# Altium PCB PCB_CSN_V3_1.PcbDoc
Units mil, origin at the board's own origin, x right, y up, seen from the top; angles counter-clockwise.
Board outline 3040 x 2075 mil, 2 copper layers (Top Layer, Bottom Layer); 91 components, 63 nets, 350 pads, 57 vias.
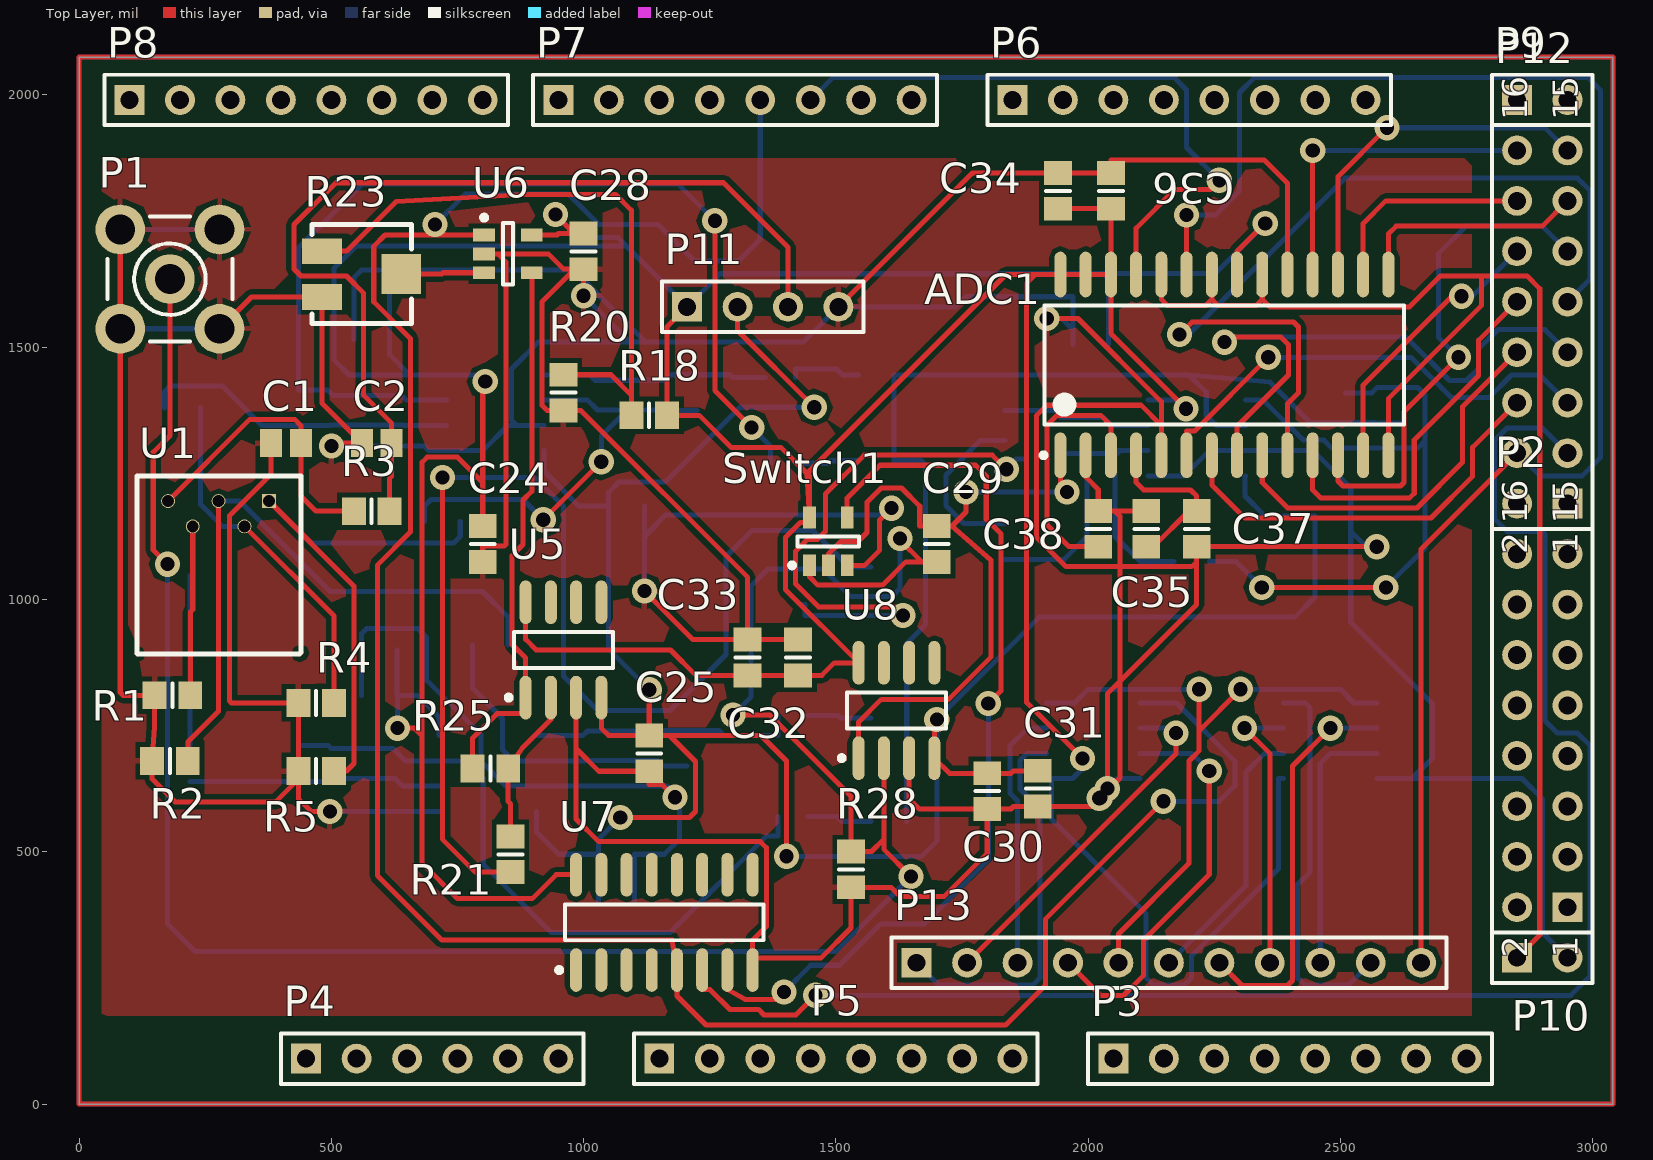
[diagram p0: Top Layer view]
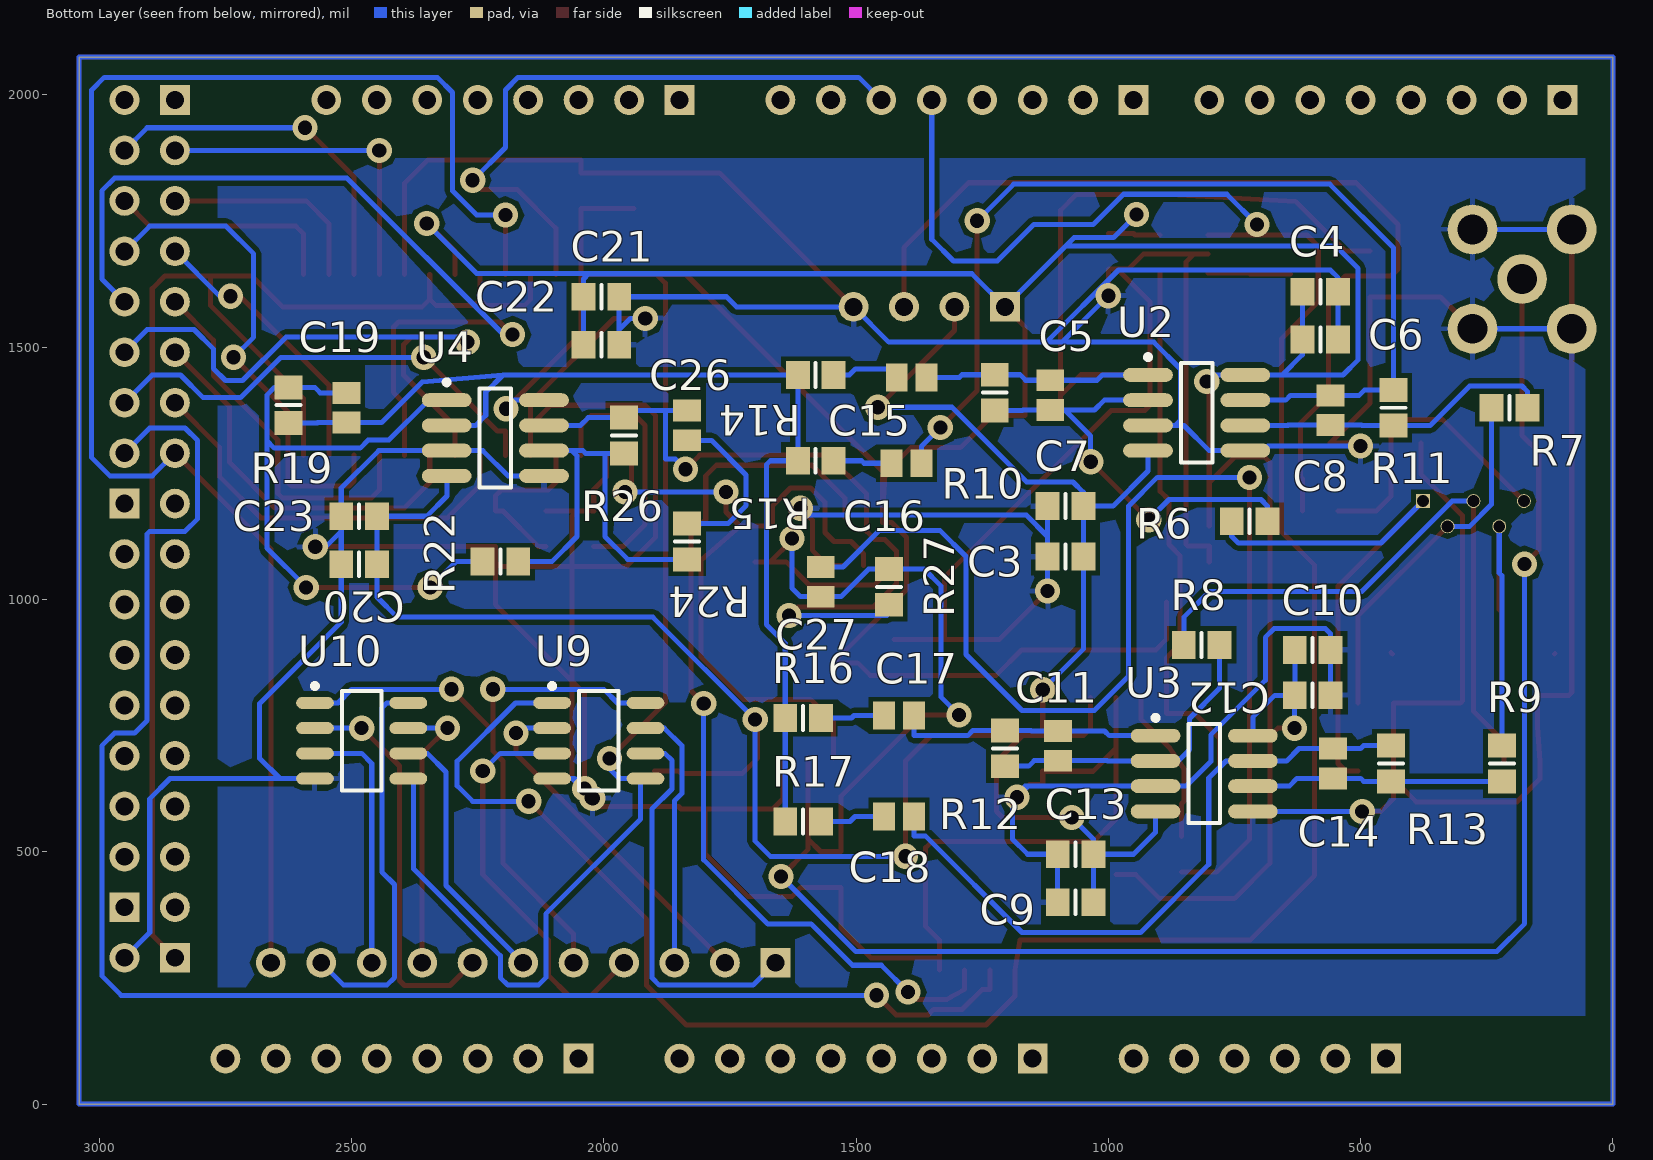
[diagram p1: Bottom Layer view, seen from below]

## Layer stack, top to bottom
Top Layer: signal copper 1.4
Dielectric: dielectric 12.6, FR-4, Dk 4.8
Bottom Layer: signal copper 1.4

## Board outline
0,0 0,2075 3040,2075 3040,0 0,0

## Design rules (kind name [scope] priority, off if disabled: settings)
Clearance [All] p1: gap=10
PolygonConnect [All] p1: connectstyle=Relief reliefconductorwidth=10 reliefentries=4 polygonreliefangle="90 Angle"
RoutingVias [All] p1: holewidth=28 width=50 viastyle="Through Hole" minholewidth=28 minwidth=50 maxholewidth=28 maxwidth=50
SilkscreenOverComponentPads [All] p1: minsilkscreentomaskgap=10
SolderMaskExpansion [All] p1: expansion=4
Width [All] p1: maxlimit=10 minlimit=10 preferedwidth=10
27 further rules are at their usual default settings.

## Classes and differential pairs
component class "Components Class 1": C3 C4 C5 C6 C7 C8 C9 C10 C11 C12 C13 C14 C15 C16 C17 C18 C19 C20 C21 C22 C23 C26 C27 R6 R7 R8 R9 R10 R11 R12 R13 R14 R15 R16 R17 R19 R22 R24 R26 R27 U2 U3 U4 U9 U10
net class potencia: +5 +70V -5 GND
net class digital: DGND NetADC1_6 NetADC1_7 NetADC1_8 NetADC1_9 NetADC1_10 NetADC1_11 NetADC1_12 NetADC1_13 NetADC1_15 NetADC1_16 NetADC1_17 NetADC1_18 NetADC1_23 NetADC1_25 NetP12_1 NetP12_2 NetP12_3
net class analog: NetADC1_1 NetADC1_4 NetC27_2 NetR18_2 NetR23_W NetR25_2
component class Logica_ADC: ADC1 C29 C30 C31 C32 C33 C34 C35 C36 C37 C38 P2 P3 P4 P5 P6 P7 P8 P9 P10 P11 P12 P13 R28 Switch1 U7 U8 U9 U10
component class Hamamatsu_acond: C1 C2 C3 C4 C5 C6 C7 C8 C9 C10 C11 C12 C13 C14 C15 C16 C17 C18 C19 C20 C21 C22 C23 C24 C25 C26 C27 C28 P1 R1 R2 R3 R4 R5 R6 R7 R8 R9 R10 R11 R12 R13 R14 R15 R16 R17 R18 R19 R20 R21 R22 R23 R24 R25 R26 R27 U1 U2 U3 U4 U5 U6

## Components (designator, comment, footprint, x,y, rotation, side; value= is the part's Value field where it differs from the comment)
ADC1 "LTC1415" SO28_N 2270,1465 r90 top
C1 "Cap" C0805 410,1310 r0 top
C2 "Cap" C0805 590,1310 r0 top
C3 "Cap Pol3" 6-0805_N 1085,1085 r180 bottom
C4 "Cap Pol3" 6-0805_N 580,1610 r180 bottom
C5 "Cap" C0805 1115,1405 r90 bottom
C6 "Cap" 6-0805_N 580,1515 r0 bottom
C7 "Cap" 6-0805_N 1085,1185 r180 bottom
C8 "Cap" C0805 560,1375 r90 bottom
C9 "Cap Pol3" 6-0805_N 1065,400 r180 bottom
C10 "Cap Pol3" 6-0805_N 595,900 r180 bottom
C11 "Cap" C0805 1100,710 r90 bottom
C12 "Cap" 6-0805_N 595,810 r0 bottom
C13 "Cap" 6-0805_N 1065,495 r180 bottom
C14 "Cap" C0805 555,675 r90 bottom
C15 "Cap" C0805 1390,1440 r0 bottom
C16 "Cap" C0805 1400,1270 r0 bottom
C17 "Cap" C0805 1415,770 r0 bottom
C18 "Cap" C0805 1415,570 r0 bottom
C19 "Cap" C0805 2510,1380 r90 bottom
C20 "Cap Pol3" 6-0805_N 2485,1070 r180 bottom
C21 "Cap Pol3" 6-0805_N 2005,1600 r180 bottom
C22 "Cap" 6-0805_N 2005,1505 r0 bottom
C23 "Cap" 6-0805_N 2485,1165 r180 bottom
C24 "Cap" 6-0805_N 800,1110 r90 top
C25 "Cap" 6-0805_N 1130,695 r270 top
C26 "Cap" C0805 1835,1345 r90 bottom
C27 "Cap" C0805 1570,1035 r270 bottom
C28 "Cap" 6-0805_N 1000,1690 r270 top
C29 "Cap" 6-0805_N 1700,1110 r90 top
C30 "Cap" 6-0805_N 1800,620 r270 top
C31 "Cap Pol3" 6-0805_N 1900,625 r90 top
C32 "Cap" 6-0805_N 1425,885 r270 top
C33 "Cap Pol3" 6-0805_N 1325,885 r90 top
C34 "Cap Pol3" 6-0805_N 1940,1810 r90 top
C35 "Cap Pol3" 6-0805_N 2115,1140 r90 top
C36 "Cap" 6-0805_N 2045,1810 r270 top
C37 "Cap" 6-0805_N 2215,1140 r90 top
C38 "Cap" 6-0805_N 2020,1140 r90 top
P1 "SMB" SMB_V-RJ45 180,1635 r0 top
P2 "Header 8X2" HDR2X8 2950,390 r90 top
P3 "Header 8" HDR1X8 2050,90 r0 top
P4 "Header 6" HDR1X6 450,90 r0 top
P5 "Header 8" HDR1X8 1150,90 r0 top
P6 "Header 8" HDR1X8 1850,1990 r0 top
P7 "Header 8" HDR1X8 950,1990 r0 top
P8 "Header 8" HDR1X8 100,1990 r0 top
P9 "Header 2" HDR1X2 2850,1990 r0 top
P10 "Header 2" HDR1X2 2850,290 r0 top
P11 "Header 4" HDR1X4 1205,1580 r0 top
P12 "Header 8X2" HDR2X8 2950,1190 r90 top
P13 "Header 11" HDR1X11 1660,280 r0 top
R1 "Res3" 6-0805_N 185,810 r0 top
R2 "Res3" 6-0805_N 180,680 r0 top
R3 "Res3" 6-0805_N 580,1175 r0 top
R4 "Res3" 6-0805_N 470,795 r0 top
R5 "Res3" 6-0805_N 470,660 r0 top
R6 "Res3" 6-0805_N 720,1155 r180 bottom
R7 "Res3" 6-0805_N 205,1380 r180 bottom
R8 "Res3" 6-0805_N 815,910 r180 bottom
R9 "Res3" 6-0805_N 220,675 r270 bottom
R10 "Res3" 6-0805_N 1225,1410 r90 bottom
R11 "Res3" 6-0805_N 435,1380 r90 bottom
R12 "Res3" 6-0805_N 1205,705 r90 bottom
R13 "Res3" 6-0805_N 440,675 r90 bottom
R14 "Res3" 6-0805_N 1580,1445 r0 bottom
R15 "Res3" 6-0805_N 1580,1275 r0 bottom
R16 "Res3" 6-0805_N 1605,765 r0 bottom
R17 "Res3" 6-0805_N 1605,560 r0 bottom
R18 "Res3" 6-0805_N 1130,1365 r180 top
R19 "Res3" 6-0805_N 2625,1385 r90 bottom
R20 "Res3" 6-0805_N 960,1410 r90 top
R21 "Res3" 6-0805_N 855,495 r90 top
R22 "Res3" 6-0805_N 2205,1075 r180 bottom
R23 "RPot SM" POT4MM-2 560,1645 r0 top
R24 "Res3" 6-0805_N 1835,1115 r90 bottom
R25 "Res3" 6-0805_N 815,665 r180 top
R26 "Res3" 6-0805_N 1960,1325 r90 bottom
R27 "Res3" 6-0805_N 1435,1025 r90 bottom
R28 "Res3" 6-0805_N 1530,465 r90 top
Switch1 "SN74LVC1G66DBVR" SOT23-5_N 1485,1115 r90 top
U1 "MPPC_S10985" S10985_HAM 115,1245 r0 top
U2 "AD8002AR" SO-8_M 825,1370 r180 bottom
U3 "AD8002AR" SO-8_M 810,655 r180 bottom
U4 "AD8002" SO-8_M 2215,1320 r180 bottom
U5 "THS4062" S8_N 960,900 r90 top
U6 "ADCMP600" SOT23-5_N 850,1685 r0 top
U7 "SN74LS279AD" D016_N 1160,360 r90 top
U8 "AD8066" S8_N 1620,780 r90 top
U9 "DS1100-500" SO-8_L 2010,720 r180 bottom
U10 "DS1100-500" SO-8_L 2480,720 r180 bottom

## Footprints (in the part's own frame and the unit in brackets; to place one, negate y for a bottom-side part, rotate by r counter-clockwise, add the part's x,y. Pads: shape width x height; smd on the part's side, far side on the other; paste and mask are expansions set on the pad)
6-0805_N [mm] "Chip Resistor, Body 2.0x1.2mm, IPC Medium Density"
  rect 1.2x1.4 smd: 1(-0.9,0) 2(0.9,0)
  silkscreen extent 0,-0.6 0,0.6, body extent -1.07,-0.7 1.07,0.7, height 0.7
C0805 [mm] "Chip Capacitor, Body 2.0x1.3mm, IPC High Density"
  rect 1.1x1.4 smd: 1(-0.75,0) 2(0.75,0)
  body extent -1.1,-0.72 1.1,0.72, height 1.4
D016_N [mm] "SOIC, 16-Leads, Body 9.9x3.9mm, Pitch 1.27mm, IPC Medium Density"
  oval 2.2x0.6 smd: 1(-2.4,4.445) 2(-2.4,3.175) 3(-2.4,1.905) 4(-2.4,0.635) 5(-2.4,-0.635) 6(-2.4,-1.905) 7(-2.4,-3.175) 8(-2.4,-4.445) 9(2.4,-4.445) 10(2.4,-3.175) 11(2.4,-1.905) 12(2.4,-0.635) 13(2.4,0.635) 14(2.4,1.905) 15(2.4,3.175) 16(2.4,4.445)
  silkscreen extent -2.52,-5 0.9,5.42, body extent -1.95,-4.95 1.95,4.95, height 1.75
HDR1X2 [mm] "Connector; Header; 2 Position"
  rect 1.5x1.5 hole 0.9: 1(0,0)
  round 1.5 hole 0.9: 2(2.54,0)
  silkscreen extent -1.27,-1.27 3.81,1.27
HDR1X4 [mm] "Connector; Header; 4 Position"
  rect 1.5x1.5 hole 0.9: 1(0,0)
  round 1.5 hole 0.9: 2(2.54,0) 3(5.08,0) 4(7.62,0)
  silkscreen extent -1.27,-1.27 8.89,1.27
HDR1X6 [mm] "Connector; Header; 6 Position"
  rect 1.5x1.5 hole 0.9: 1(0,0)
  round 1.5 hole 0.9: 2(2.54,0) 3(5.08,0) 4(7.62,0) 5(10.16,0) 6(12.7,0)
  silkscreen extent -1.27,-1.27 13.97,1.27
HDR1X8 [mm] "Connector; Header; 8 Position"
  rect 1.5x1.5 hole 0.9: 1(0,0)
  round 1.5 hole 0.9: 2(2.54,0) 3(5.08,0) 4(7.62,0) 5(10.16,0) 6(12.7,0) 7(15.24,0) 8(17.78,0)
  silkscreen extent -1.27,-1.27 19.05,1.27
HDR1X11 [mm] "Connector; Header; 11 Position"
  rect 1.5x1.5 hole 0.9: 1(0,0)
  round 1.5 hole 0.9: 2(2.54,0) 3(5.08,0) 4(7.62,0) 5(10.16,0) 6(12.7,0) 7(15.24,0) 8(17.78,0) 9(20.32,0) 10(22.86,0) 11(25.4,0)
  silkscreen extent -1.27,-1.27 26.67,1.27
HDR2X8 [mm] "Connector; Header; 8x2 Position"
  rect 1.5x1.5 hole 0.9: 1(0,0)
  round 1.5 hole 0.9: 2(0,2.54) 3(2.54,0) 4(2.54,2.54) 5(5.08,0) 6(5.08,2.54) 7(7.62,0) 8(7.62,2.54) 9(10.16,0) 10(10.16,2.54) 11(12.7,0) 12(12.7,2.54) 13(15.24,0) 14(15.24,2.54) 15(17.78,0) 16(17.78,2.54)
  silkscreen extent -1.27,-1.27 19.05,3.81
POT4MM-2 [mm] "Square Trimming Potentiometer"
  rect 2x1.3 smd: CCW(-2,-1.15) CW(-2,1.15)
  rect 2x2 smd: W(2,0)
  silkscreen extent -2.5,-2.5 2.5,2.5
S8_N [mm] "SOIC, 8-Leads, Body 4.9x3.9mm, Pitch 1.27mm, IPC Medium Density"
  oval 2.2x0.6 smd: 1(-2.4,1.905) 2(-2.4,0.635) 3(-2.4,-0.635) 4(-2.4,-1.905) 5(2.4,-1.905) 6(2.4,-0.635) 7(2.4,0.635) 8(2.4,1.905)
  silkscreen extent -2.52,-2.5 0.9,2.88, body extent -2,-2.5 2,2.5, height 1.76
S10985_HAM [mm]
  rect 0.7x0.7 hole 0.6: 1(6.64,-1.27)
  round 0.7 hole 0.6: 2(5.4,-2.54) 3(4.1,-1.27) 4(2.8,-2.54) 5(1.56,-1.27)
  Top Layer lines w0.254: 0,-8.95 0.025,-8.975 ; 8.175,-8.975 8.25,-8.9
  silkscreen extent 0,-8.97 8.25,0
SMB_V-RJ45 [mm] "Connector; SMB Straight"
  round 2.5 hole 1.5: 1(0,0) 2(-2.5,-2.5) 2(-2.5,2.5) 2(2.5,-2.5) 2(2.5,2.5)
  silkscreen extent -3.15,-3.15 3.15,3.15
SO28_N [mm] "28-Pin Plastic Small Outline Integrated Circuit 1.27 mm Pitch, IPC Medium Density"
  oval 2.3x0.6 smd: 1(-4.55,8.255) 2(-4.55,6.985) 3(-4.55,5.715) 4(-4.55,4.445) 5(-4.55,3.175) 6(-4.55,1.905) 7(-4.55,0.635) 8(-4.55,-0.635) 9(-4.55,-1.905) 10(-4.55,-3.175) 11(-4.55,-4.445) 12(-4.55,-5.715) 13(-4.55,-6.985) 14(-4.55,-8.255) 15(4.55,-8.255) 16(4.55,-6.985) 17(4.55,-5.715) 18(4.55,-4.445) 19(4.55,-3.175) 20(4.55,-1.905) 21(4.55,-0.635) 22(4.55,0.635) 23(4.55,1.905) 24(4.55,3.175) 25(4.55,4.445) 26(4.55,5.715) 27(4.55,6.985) 28(4.55,8.255)
  silkscreen extent -4.67,-9.05 3,9.23, body extent -3.8,-9.06 3.8,9.06, height 2.65
SO-8_L [mm] "SOIC, 8-Leads, Body 4.9x3.9mm, Pitch 1.27mm, IPC High Density"
  oval 1.9x0.6 smd: 1(-2.35,1.905) 2(-2.35,0.635) 3(-2.35,-0.635) 4(-2.35,-1.905) 5(2.35,-1.905) 6(2.35,-0.635) 7(2.35,0.635) 8(2.35,1.905)
  silkscreen extent -2.48,-2.5 1,2.88, body extent -1.95,-2.45 1.95,2.45, height 1.75
SO-8_M [mm] "SOIC, 8-Leads, Body 4.9x3.9mm, Pitch 1.27mm, IPC Low Density"
  oval 2.5x0.7 smd: 1(-2.45,1.905) 2(-2.45,0.635) 3(-2.45,-0.635) 4(-2.45,-1.905) 5(2.45,-1.905) 6(2.45,-0.635) 7(2.45,0.635) 8(2.45,1.905)
  silkscreen extent -2.58,-2.5 0.8,2.93, body extent -2,-2.5 2,2.5, height 1.75
SOT23-5_N [mm] "SOT23, 5-Leads, Body 2.9x1.6mm, Pitch 0.95mm, Lead Span 2.8mm, IPC Medium Density"
  rect 1.1x0.65 smd: 1(-1.2,0.95) 2(-1.2,0) 3(-1.2,-0.95) 4(1.2,-0.95) 5(1.2,0.95)
  silkscreen extent -1.32,-1.55 0.25,1.95, body extent -0.9,-1.55 0.9,1.55, height 1.45

## Part data
C1 C2 C5 C6 C7 C8 C11 C12 C13 C14 C15 C16 C17 C18 C19 C22 C23 C24 C25 C26 C27 C28 C29 C30 C32 C36 C37 C38: "Capacitor"
C3 C4 C9 C10 C20 C21 C31 C33 C34 C35: "Polarized Capacitor (Surface Mount)"
P1: "SMB Straight Connector"
P2 P12: "Header, 8-Pin, Dual row"
P3 P5 P6 P7 P8: "Header, 8-Pin"
P4: "Header, 6-Pin"
P9 P10: "Header, 2-Pin"
P11: "Header, 4-Pin"
P13: "Header, 11-Pin"
R1 R2 R3 R4 R5 R6 R7 R8 R9 R10 R11 R12 R13 R14 R15 R16 R17 R18 R19 R20 R21 R22 R24 R25 R26 R27 R28: "Resistor"
R23: "Square Trimming Potentiometer"
U2 U3: "Dual 600MHz, 50mW Current Feedback Amplifier"
U4: library part AD8002AR, "Dual 600MHz, 50mW Current Feedback Amplifier"
U5 U8: library part LT1253CS8, "Low Cost Dual Video Amplifier"
U7: "Quadruple S-R Latches"

## Via types
v1: diameter 50, hole 28, Top Layer to Bottom Layer, 57 vias

## Nets (pads, with @x,y where several pads share a name; then routed paths per layer and width w, separated by ;. In a path a pad name is that pad's centre, name@x,y a point inside that pad or via, vN(x,y) a via of type N, cw(c..) or ccw(c..) an arc to the next point about the centre after c; other vN are vias at no path point)
+5: ADC1.21 ADC1.26 ADC1.27 ADC1.28 C4.1 C6.2 C10.1 C12.2 C21.1 C22.2 C24.2 C28.1 C32.2 C33.1 C34.1 C36.2 P11.1 R18.1 Switch1.5 U2.8 U3.8 U4.8 U5.8 U6.5 U7.16 U8.8 U9.5 U10.5 | length 11401
  Top Layer w10: v1(631,745) 664,745 680,729 ; C24.2 800,1232 ; v1(805,1432) 800,1427 800,1232 ; U5.8 885,921 906,900 1172,900 1222.43,849.57 C33.1 1374,849.57 C32.2 1472,849.57 1496.92,874.49 U8.8 1399.8,1019.69 1399.8,1122.8 1430,1153 1447.6,1153 Switch1.5 ; U6.5 947,1722.4 950.03,1725.43 972,1725.43 ; v1(944,1763) 972,1735 972,1725.43 ; U7.16 945.49,454.49 898,407 750,407 680,477 680,729 ; C28.1 972,1725.43 ; P11.1 1165.43,1540.43 R18.1 1229,1365 1293,1301 1391.6,1301 1442.87,1249.73 ; C34.1 1992,1774.57 C36.2 ADC1.26 ; v1(1989,685) 1878,796 1878,1627 1895,1644 ; v1(2194,1378) 2045,1527 ADC1.26 ; ADC1.21 2295,1690 2350,1745 v1(2351,1745) ; 680,729 680,1272 690,1282 750,1282 800,1232 ; 1442.87,1249.73 1837.14,1644 1895,1644 ; 1442.87,1249.73 Switch1.5 ; 1442.87,1249.73 1447.6,1245 Switch1.5 ; 1895,1644 1945,1644 ADC1.28 ADC1.27 ADC1.26
  Bottom Layer w10: C4.1 C6.2 615.43,1485 655.43,1445 ; C10.1 C12.2 C12.2@631,810 ; v1(631,745) C12.2@631,810 ; U3.8 713.54,766.46 670,810 C12.2@631,810 ; v1(805,1432) 792,1445 U2.8 655.43,1445 ; v1(944,1763) 990,1717 1068,1717 1084,1701 ; U9.5 U9.5@1927,645 ; v1(1989,685) 1989,665 1969,645 U9.5@1927,645 ; C22.2 C21.1 2040.43,1635.13 2030,1645.57 1270.57,1645.57 ; U4.8 2177,1395 v1(2194,1378) ; v1(2351,1745) 2252,1646 1271,1646 1270.57,1645.57 ; U10.5 2377,645 2377,466 2205,294 2205,250.47 2190,235.47 2130,235.47 2115,250.47 2115,377 1927,565 U9.5@1927,645 ; 655.43,1445 535,1445 505,1475 505,1656 550,1701 1084,1701 ; 1084,1701 P11.1 1270.57,1645.57
+70V: C2.2 P11.3 R3.2 | length 1887
  Top Layer w10: R3.2 615.43,1240 619.53,1244.09 C2.2 619.53,1349.47 564,1405 564,1607 530,1641 440,1641 426,1655 426,1743 509,1826 1277,1826 1405,1698 P11.3
-5: C3.2 C7.2 C9.2 C13.2 C20.2 C23.2 C25.1 C30.1 C31.2 P11.2 U2.4 U3.4 U4.4 U5.4 U8.4 | length 4845.3
  Top Layer w10: U5.4 1035,745 1049.57,730.43 C25.1 ; v1(1072.51,567.94) 1210,567.94 1221.62,579.57 1221.62,678.81 1170,730.43 ; v1(1130,821) C25.1 ; P11.2 1305,1533 v1(1457,1381) ; v1(1402,491) 1402,680 1351.57,730.43 1170,730.43 ; v1(1700,762) 1695,757 U8.4 1725.08,655.43 C30.1 1847,655.43 1852,660.43 C31.2 ; C25.1 1170,730.43
  Bottom Layer w10: U3.4 906.46,538.54 950,495 C13.2 ; U2.4 921.46,1254.54 990.99,1185 C7.2 ; C9.2 C13.2 ; v1(1072.51,567.94) 1029.57,525 C13.2 ; v1(1130,821) 1049.57,901.43 C3.2 C7.2 ; v1(1402,491) 1670,491 1700,521 v1(1700,762) 1903,965 2409.57,965 2449.57,1005 C20.2 C23.2 2351,1165 2311,1205 2311,1245 U4.4 ; v1(1457,1381) 1310,1381 1162,1233 1070,1233 1049.57,1212.57 C7.2
DGND: ADC1.14 ADC1.20 ADC1.22 ADC1.24 P10.1 | length 2735.5
  Top Layer w10: ADC1.24 2145,1595 2157,1583 2233,1583 2245,1595 ; ADC1.22 2245,1595 ; ADC1.20 2345,1595 ; ADC1.14 2595,1398 2780,1583 2780,1641 ; P10.1 2895,335 2895,1616 2870,1641 2780,1641 ; 2245,1595 2257,1583 2333,1583 2345,1595 ; 2345,1595 2360,1580 2637,1580 2698,1641 2780,1641
GND: ADC1.2 ADC1.5 ADC1.19 C1.1 C2.1 C3.1 C4.2 C6.1 C7.1 C9.1 C10.2 C12.1 C13.1 C20.1 C21.2 C22.1 C23.1 C24.1 C25.2 C28.2 C30.2 C31.1 C32.1 C33.2 C34.2 C35.2 C36.1 C37.1 C38.2 P1.2 P10.2 P11.4 R1.1 R2.1 R4.1 R5.1 R20.1 R23.CCW R28.1 Switch1.3 U2.3 U2.5 U3.3 U3.5 U4.3 U4.5 U5.3 U6.2 U7.8 U8.3 U9.4 U10.4 | length 19376.7
  Top Layer w10: P1.2@81.57,1733.43 81.57,1536.57 81.57,815.43 87,810 R1.1 149.57,747 R2.1 144.57,644.43 190,599 390,599 R5.1@434.57,643.57 ; P1.2@278.43,1536.57 341.58,1599.72 R23.CCW@481,1599.72 ; C1.1 380.47,1248.47 298,1166 298,799 302,795 R4.1 434.57,727 R5.1 R5.1@434.57,643.57 ; R23.CCW R23.CCW@481,1599.72 ; v1(497,580) 459.57,580 434.57,605 R5.1@434.57,643.57 ; v1(500,1304) 506,1310 C2.1 481,1389.47 R23.CCW@481,1599.72 ; C24.1 800,1106 842.56,1106 845.76,1109.2 845.76,1669.24 830,1685 ; U6.2 830,1685 ; U5.3 985,704.57 ; v1(1000,1602) C28.2 C28.2@981.97,1654.57 ; v1(1120.43,1016.57) 1216.57,920.43 C33.2 ; v1(1181,608) 1156,633 1130,633 C25.2 1030,659.57 985,704.57 ; U7.8 U7.8@1335,289 ; C32.1 C33.2 ; P11.4 1770.43,1845.43 C34.2 C36.1 2045,1871.47 2348.53,1871.47 2395,1825 ADC1.19 ; Switch1.3 1522.4,1067 1556,1067 1586.65,1097.65 1586.65,1157.65 v1(1610,1181) ; U8.3 1645,605 1665.43,584.57 C30.2 ; v1(1918,1557) 1980,1557 2145,1392 2145,1345 ; ADC1.2 1995,1243 2020,1218 C38.2 2052.57,1175.43 ; v1(2022,606) 2005.57,589.57 C31.1 1852,589.57 1847,584.57 C30.2 ; v1(2024,607) 2063,646 2063,838 ; v1(2038,625) 2038,813 2063,838 ; C35.2 2052.57,1175.43 ; ADC1.5 2145,1345 ; v1(2572,1104.57) C37.1 2215,1075 ; 830,1685 930,1685 960.43,1654.57 C28.2@981.97,1654.57 ; C28.2@981.97,1654.57 917.44,1590.04 917.44,1385 927.87,1374.57 R20.1 994.43,1374.57 1325,1044 C33.2 ; 985,704.57 985,565 1030,520 1350,520 1362,508 1362,352 1335,325 U7.8@1335,289 ; U7.8@1335,289 1470,289 1530,349 R28.1 1609,429.57 1627.57,411 1714,411 1800,497 C30.2 ; 2052.57,1175.43 2063,1165 2063,1065 ; 2063,838 2215,990 2215,1075 ; 2063,838 2063,1065 ; 2063,1065 2205,1065 2215,1075 ; 2063,1065 1956,1065 1898,1123 1898,1365 1918,1385 2105,1385 2145,1345
  Bottom Layer w10: P1.2@81.57,1536.57 P1.2@278.43,1536.57 ; P1.2@81.57,1733.43 P1.2@278.43,1733.43 ; v1(497,580) U3.5 ; v1(500,1304) 684,1304 693,1295 U2.5 800,1295 850,1345 867,1345 ; C6.1 544.57,1562 C4.2 544.57,1637.57 560,1653 980,1653 1123,1510 ; C12.1 559.57,854 C10.2 559.57,932.13 570,942.57 671.43,942.57 689,925 689,839.78 797,731.78 797,679 846,630 U3.3 1159,630 ; U2.3 867,1345 ; v1(1000,1602) 1092,1510 ; C9.1 C13.1 1160,495 1190,525 1190,605 1165,630 1159,630 ; v1(1120.43,1016.57) C3.1 1120.43,1125 ; C7.1 1120.43,1135 1120.43,1125 ; v1(1181,608) 1159,630 ; v1(1610,1181) 1610,1177 1600,1167 1162.43,1167 1120.43,1125 ; v1(1918,1557) 1947.57,1557 1969.57,1535 ; C22.1 1969.57,1535 ; v1(2022,606) 2061,645 ; v1(2024,607) 2062,645 ; v1(2038,625) 2058,645 2061,645 ; U9.4 2062,645 ; U4.5 2190,1245 2240,1295 U4.3 2446.26,1295 2520.43,1220.82 C23.1 2520.43,1135 ; v1(2572,1104.57) 2550.87,1104.57 2520.43,1135 ; U10.4 2642,645 ; P10.2 2900,340 2900,605 2860,645 2642,645 ; 867,1345 857,1355 857,1457 910,1510 1092,1510 ; 1092,1510 1123,1510 ; 1123,1510 1435,1510 P11.4 1737,1580 1757,1600 C21.2 1969.57,1552 1969.57,1535 ; 2061,645 2062,645 ; 2520.43,1135 C20.1 2520.43,955.57 2682,794 2682,685 2642,645
NetADC1_1: ADC1.1 C29.2 Switch1.2 U8.1 | length 1450
  Top Layer w10: Switch1.2 1485,1090 1510,1115 1543.82,1115 1561.75,1132.93 1561.75,1192.75 1590,1221 1630,1221 1666.18,1184.82 1666.18,1145.43 C29.2 1730,1145.43 ; U8.1 1545,757 1590,802 1723.43,802 1807,885.57 1807,1078.43 1730,1145.43 ; v1(1758,1213) 1758,1173.43 1730,1145.43 ; ADC1.1 1945,1226 v1(1958,1213)
  Bottom Layer w10: v1(1758,1213) v1(1958,1213)
NetADC1_3: ADC1.3 C38.1 | length 519.4
  Top Layer w10: C38.1 1962,1104.57 1918,1148.57 1918,1345 1938,1365 2025,1365 2045,1345 ADC1.3
NetADC1_4: ADC1.4 C35.1 C37.2 | length 344
  Top Layer w10: ADC1.4 2095,1232 2110,1217 2203,1217 2215,1205 C37.2 2199.87,1175.43 2129,1104.57 C35.1
NetADC1_6: ADC1.6 P12.5 | length 938.2
  Top Layer w10: ADC1.6 2195,1334 2211,1334 v1(2357,1480)
  Bottom Layer w10: v1(2357,1480) 2640,1480 2720,1400 2794,1400 2839,1445 2895,1445 P12.5
NetADC1_7: ADC1.7 P12.6 | length 819.6
  Top Layer w10: ADC1.7 2245,1227 2310.48,1161.52 2679.45,1161.52 2762,1244.06 2762,1302 P12.6
NetADC1_8: ADC1.8 P12.7 | length 1201.7
  Top Layer w10: v1(2270,1510) 2280,1520 2382,1520 2397,1505 2397,1445 2295,1343 ADC1.8
  Bottom Layer w10: v1(2270,1510) 2280,1520 2630,1520 2716,1434 2750,1434 2774,1458 2774,1496.71 2812.29,1535 2905,1535 P12.7
NetADC1_9: ADC1.9 P12.8 | length 772
  Top Layer w10: ADC1.9 2345,1232 2395.48,1181.52 2651.52,1181.52 2742,1272 2742,1382 P12.8
NetADC1_10: ADC1.10 P12.9 | length 1705.1
  Top Layer w10: v1(2181,1525) 2206,1550 2407,1550 2417,1540 2417,1410 2395,1388 ADC1.10
  Bottom Layer w10: v1(2181,1525) 2198.94,1525 2508.94,1835 2970,1835 2995,1810 2995,1635 P12.9
NetADC1_11: ADC1.11 P12.10 | length 744.1
  Top Layer w10: ADC1.11 2445,1217 2460.48,1201.52 2637.22,1201.52 2646.24,1210.53 2646.24,1316.24 2774,1444 2774,1514 P12.10
NetADC1_12: ADC1.12 P12.11 | length 1002.8
  Top Layer w10: ADC1.12 2495,1235 2505,1225 2619.21,1225 2625.89,1231.68 2625.89,1371.89 v1(2734,1480)
  Bottom Layer w10: v1(2734,1480) 2694,1520 2694,1685 2749,1740 2900,1740 P12.11
NetADC1_13: ADC1.13 P12.12 | length 553.9
  Top Layer w10: ADC1.13 2545,1425 2721,1601 v1(2740,1601)
  Bottom Layer w10: v1(2740,1601) 2761,1601 P12.12
NetADC1_15: ADC1.15 P12.13 | length 462.4
  Top Layer w10: ADC1.15 2595,1724.41 2610.59,1740 2900,1740 P12.13
NetADC1_16: ADC1.16 P12.14 | length 424.5
  Top Layer w10: ADC1.16 2545,1745 2590,1790 P12.14
NetADC1_17: ADC1.17 P12.15 | length 707.7
  Top Layer w10: ADC1.17 2495,1838 v1(2592,1935)
  Bottom Layer w10: v1(2592,1935) 2905,1935 P12.15
NetADC1_18: ADC1.18 P12.16 | length 650.9
  Top Layer w10: ADC1.18 v1(2445,1890)
  Bottom Layer w10: v1(2445,1890) P12.16
NetADC1_23: ADC1.23 P12.4 P13.11 | length 3191.8
  Top Layer w10: ADC1.23 v1(2195,1762) ; P13.11 2660,1100 P12.4
  Bottom Layer w10: v1(2195,1762) 2252,1762 2300,1810 2300,2005 2330,2035 2990,2035 3015,2010 3015,1281 2979,1245 2895,1245 P12.4
NetADC1_25: ADC1.25 P7.6 | length 1276.1
  Top Layer w10: ADC1.25 2095,1736 2172,1813 2242,1813 v1(2260,1831)
  Bottom Layer w10: P7.6 1495,2035 2170,2035 2195,2010 2195,1896 v1(2260,1831)
NetC1_2: C1.2 R3.1 U1.5 | length 592.6
  Top Layer w10: U1.5 338.42,1357 427.53,1357 439.53,1345 C1.2 439.53,1205 469.53,1175 R3.1
NetC5_1: C5.1 R6.2 R10.1 U2.2 | length 885.8
  Top Layer w10: v1(920,1158) v1(1035,1273)
  Bottom Layer w10: R6.2 684.57,1185 697.57,1198 880,1198 v1(920,1158) ; U2.2 1008,1395 1027.53,1375.47 1086.47,1375.47 ; v1(1035,1273) 1035,1324 1086.47,1375.47 ; R10.1 1169.9,1374.57 1169,1375.47 C5.1 1086.47,1375.47
NetC5_2: C5.2 C15.1 R10.2 U2.1 | length 450.1
  Bottom Layer w10: U2.1 1012,1445 1022.47,1434.53 C5.2 1164,1434.53 1174.91,1445.43 R10.2 1290,1445.43 1295.43,1440 C15.1
NetC8_1: C8.1 R7.2 R11.1 U2.6 | length 628.9
  Bottom Layer w10: R7.2 169.57,1412.57 180,1423 284,1423 362.43,1344.57 R11.1 497,1344.57 497.9,1345.47 C8.1 644,1345.47 644.47,1345 U2.6
NetC8_2: C8.2 C16.1 R11.2 U2.7 | length 2017.4
  Top Layer w10: v1(1260,1750.76) 1260,1414 v1(1333,1341)
  Bottom Layer w10: U2.7 648.53,1395 639,1404.53 C8.2 502.91,1404.53 492,1415.43 R11.2 435,1697 561.2,1823.2 1187.56,1823.2 v1(1260,1750.76) ; v1(1333,1341) 1370.47,1303.53 C16.1
NetC11_1: C11.1 R8.2 R12.1 U3.2 | length 612.1
  Bottom Layer w10: R8.2 779.57,823.78 839.28,764.07 839.28,702.32 861.59,680 U3.2 1002,680 1002.47,680.47 C11.1 1147,680.47 1157.9,669.57 R12.1
NetC11_2: C11.2 C17.1 R12.2 U3.1 | length 527.6
  Bottom Layer w10: U3.1 998,730 1007.53,739.53 C11.2 1152,739.53 1152.91,740.43 R12.2 1268.6,740.43 1278.97,730.07 1385.47,730.07 C17.1
NetC14_1: C14.1 R9.2 R13.1 U3.6 | length 502.4
  Bottom Layer w10: R9.2 329,639.57 R13.1 494,639.57 499.9,645.47 C14.1 626,645.47 641.47,630 U3.6
NetC14_2: C14.2 C18.1 R13.2 U3.7 | length 1317.2
  Bottom Layer w10: R13.2 494,710.43 499.91,704.53 C14.2 622,704.53 646.53,680 U3.7 767,680 801,646 801,475 936,340 1171,340 1362,531 1385.47,531 C18.1
NetC15_2: C15.2 R14.1 | length 147.1
  Bottom Layer w10: C15.2 1419.53,1457.05 1501.31,1457.05 1513.36,1445 R14.1
NetC16_2: C16.2 R15.1 | length 117.1
  Bottom Layer w10: C16.2 1484,1270 1489,1275 R15.1
NetC17_2: C17.2 R16.1 | length 127.1
  Bottom Layer w10: C17.2 1504,770 1509,765 R16.1
NetC18_2: C18.2 R17.1 | length 129.2
  Bottom Layer w10: C18.2 1502,570 1512,560 R17.1
NetC19_1: C19.1 R14.2 R15.2 R16.2 R17.2 R19.1 U4.2 | length 2182.2
  Bottom Layer w10: R17.2 R16.2 1640.43,912.89 1678,950.45 1678,1267 1670,1275 R15.2 R14.2 2200,1445 ; U4.2 2254,1345 2234,1365 2234,1411 2200,1445 ; R19.1 2567.9,1349.57 2567,1350.47 C19.1 2440.53,1350.47 2360,1431 2200,1445
NetC19_2: C19.2 R19.2 R22.1 U4.1 | length 1355
  Top Layer w10: v1(2344,1024) v1(2590,1024)
  Bottom Layer w10: R22.1 2293,1075 v1(2344,1024) ; U4.1 2347,1395 2426,1316 2467,1316 2483,1300 2653,1300 2668,1315 ; C19.2 2562,1409.53 2572.91,1420.43 R19.2 2652.57,1420.43 2668,1405 2668,1315 ; v1(2590,1024) 2668,1102 2668,1315
NetC26_1: C26.1 R24.2 | length 338
  Bottom Layer w10: R24.2 1753.57,1150.43 1718,1186 1718,1246.82 1786.65,1315.47 C26.1
NetC26_2: C26.2 R26.2 R27.1 U4.7 | length 1524.4
  Top Layer w10: v1(1633,968) 1616,985 1465.8,985 1419.8,1031 1419.8,1095.8 1443,1119 1463,1119 1479,1135 1479,1209 1556,1286 1810,1286 v1(1838,1258)
  Bottom Layer w10: R27.1 1439,989.57 1439,968 v1(1633,968) ; C26.2 1878,1374.53 ; v1(1838,1258) 1858,1278 1878,1278 1878,1374.53 ; U4.7 2046.43,1345 2031,1360.43 R26.2 1944.83,1360.43 1944.83,1374.53 1878,1374.53
NetC27_1: C27.1 R21.1 | length 2409.4
  Top Layer w10: v1(720,1242) 720,525 785.43,459.57 R21.1
  Bottom Layer w10: v1(720,1242) 903.02,1242 960.02,1185 960.02,847.98 1028,780 1171,780 1282,891 1282,1085 1334,1137 1453.53,1137 1526,1064.53 C27.1
NetC27_2: C27.2 C29.1 P1.1 R27.2 R28.2 Switch1.1 U8.2 | length 4676.9
  Top Layer w10: v1(175,1070) 147,1098 147,1292 180,1325 P1.1 ; v1(1296,771) 1369,771 1530,610 R28.2 1570.43,500.43 1595,525 ; Switch1.1 1447.6,1045 1464.18,1028.42 1592.42,1028.42 1638.57,1074.57 1670,1074.57 ; U8.2 1595,525 ; v1(1627,1121) 1627,1117.57 1670,1074.57 ; v1(1649,451) 1595,505 1595,525 ; C29.1 1670,1074.57
  Bottom Layer w10: v1(175,1070) 175,357.49 230,302.49 1500.49,302.49 v1(1649,451) ; v1(1296,771) 1332,807 1332,1027 1365.43,1060.43 R27.2 1475,1060.43 1529.96,1005.47 C27.2 1610,1005.47 1627,1022.47 v1(1627,1121)
NetP7_5: P7.5 U6.1 U7.5 U9.1 | length 5016.4
  Top Layer w10: v1(705.2,1743) 725.79,1722.4 ; U6.1 725.79,1722.4 ; v1(2149,600) 1915,366 1915,235 1836.56,156.56 1242.44,156.56 1185,214 U7.5 1175,325 719,325 591,453 591,1068 657,1134 657,1517 584,1590 584,1700 606.4,1722.4 725.79,1722.4
  Bottom Layer w10: v1(705.2,1743) 765.39,1803.2 970,1803.2 1030.2,1743 1147.76,1743 1220,1670.76 1306.84,1670.76 1350,1713.92 P7.5 ; U9.1 2175,795 2290.55,679.45 2290.55,630.55 2260,600 v1(2149,600)
NetP12_3: P12.3 U7.6 | length 3231.7
  Top Layer w10: U7.6 1235,227 1250.2,227 1290,187.2 1347,187.2 1357.65,176.56 1420.56,176.56 v1(1459.47,215.47)
  Bottom Layer w10: v1(1459.47,215.47) 2956.47,215.47 2995,254 2995,710 2970,735 2930,735 2905,760 2905,1130 2900,1135 2830,1135 2805,1160 2805,1315 2830,1340 2900,1340 P12.3
NetP13_1: P13.1 U9.6 | length 774.6
  Bottom Layer w10: P13.1 1704.53,235.47 1890,235.47 1904.53,250 1904.53,585 1865.08,624.45 1865.08,681.08 1879,695 U9.6
NetP13_2: P13.2 U9.2 | length 702.1
  Top Layer w10: P13.2 2174,694 v1(2174,735)
  Bottom Layer w10: U9.2 2164,745 v1(2174,735)
NetP13_3: P13.3 U9.7 | length 523.1
  Bottom Layer w10: P13.3 1860,601 1845.08,615.92 1845.08,710.08 1880,745 U9.7
NetP13_4: P13.4 U9.3 | length 804.3
  Top Layer w10: P13.4 2025,215 2070,215 2110,255 2110,325 2240,455 v1(2240,660)
  Bottom Layer w10: U9.3 2205,695 v1(2240,660)
NetP13_5: P13.5 U9.8 U10.1 | length 1319.6
  Top Layer w10: P13.5 2060,337 2200,477 2200,680 2220,700 2220,740 ; v1(2220,822) 2220,740 ; v1(2302,822) 2220,740
  Bottom Layer w10: U9.8 1973,795 2000,822 v1(2220,822) ; v1(2302,822) 2500,822 2527,795 U10.1
NetP13_6: P13.6 U10.6 | length 531.2
  Bottom Layer w10: P13.6 2313,433 2313,658 2350,695 U10.6
NetP13_7: P13.7 U10.2 | length 791.4
  Top Layer w10: P13.7 2305,235 2395,235 2405,245 2405,670 v1(2480,745)
  Bottom Layer w10: v1(2480,745) U10.2
NetP13_8: P13.8 U10.7 | length 563.2
  Top Layer w10: v1(2310,745) 2360,695 P13.8
  Bottom Layer w10: v1(2310,745) U10.7
NetP13_9: P13.9 U10.3 | length 515.8
  Bottom Layer w10: P13.9 2460,675 2480,695 U10.3
NetP13_10: P13.10 U10.8 | length 771.2
  Bottom Layer w10: U10.8 2430,795 2440,785 2440,460 2415,435 2415,250.47 2430,235.47 2515.47,235.47 P13.10
NetR1_2: R1.2 R9.1 U1.4 | length 773.7
  Top Layer w10: R1.2 220.43,975 225.24,979.8 U1.4
  Bottom Layer w10: R9.1 220,1047 225.24,1052.24 U1.4
NetR2_2: R2.2 R8.1 U1.3 | length 1264.5
  Top Layer w10: R2.2 215.43,717.43 276.42,778.42 U1.3
  Bottom Layer w10: U1.3 318.64,1195 497.64,1016 799.43,1016 850.43,965 R8.1
NetR4_2: R4.2 R7.1 U1.2 | length 720.3
  Top Layer w10: U1.2 505.43,967.16 R4.2
  Bottom Layer w10: R7.1 240.43,1188.57 284,1145 U1.2
NetR5_2: R5.2 R6.1 U1.1 | length 1084.4
  Top Layer w10: U1.1 545,1026.42 545,675 530,660 R5.2
  Bottom Layer w10: U1.1 459.42,1112 742.43,1112 755.43,1125 R6.1
NetR18_2: R18.2 R20.2 R23.CW | length 1225.4
  Top Layer w10: R23.CW 530,1690.28 628.72,1789 880,1803 1063,1803 1094.57,1771.43 1094.57,1405 ; R20.2 1054.13,1445.43 1094.57,1405 ; R18.2 1094.57,1405
NetR21_2: R21.2 R25.1 U5.2 | length 309.2
  Top Layer w10: R21.2 855,595 850.43,599.57 R25.1 878,705 935,762 U5.2
NetR22_2: R22.2 R24.1 R26.1 U4.6 | length 818.6
  Bottom Layer w10: R24.1 1952.57,1079.57 1998,1125 1998,1289.57 ; R26.1 1998,1289.57 ; U4.6 2063,1295 ; R22.2 2103,1075 2053,1125 2053,1285 2063,1295 ; 1998,1289.57 2036,1289.57 2041.43,1295 2063,1295
NetR23_W: R23.W U6.3 | length 165.1
  Top Layer w10: R23.W 719,1645 721.6,1647.6 U6.3
NetR25_2: R25.2 U5.1 U6.4 | length 1086.7
  Top Layer w10: R25.2 779.57,725 828.57,774 885,774 U5.1 885,884 858.03,910.97 858.03,1086.81 880,1108.78 880,1197.01 897.24,1214.25 U6.4
NetSwitch1_4: Switch1.4 U7.7 | length 1808.7
  Top Layer w10: U7.7 1285,227 1320,207.2 1382.2,207.2 v1(1397,222) ; Switch1.4 1522.4,1201 1587.4,1266 1777,1266 1798,1245 1798,1159 1827,1130 1827,819 v1(1802,794)
  Bottom Layer w10: v1(1397,222) 1450,275 1507,275 1589,357 1675,357 1802,484 v1(1802,794)
pads on no net: P2.1 P2.2 P2.3 P2.4 P2.5 P2.6 P2.7 P2.8 P2.9 P2.10 P2.11 P2.12 P2.13 P2.14 P2.15 P2.16 P3.1 P3.2 P3.3 P3.4 P3.5 P3.6 P3.7 P3.8 P4.1 P4.2 P4.3 P4.4 P4.5 P4.6 P5.1 P5.2 P5.3 P5.4 P5.5 P5.6 P5.7 P5.8 P6.1 P6.2 P6.3 P6.4 P6.5 P6.6 P6.7 P6.8 P7.1 P7.2 P7.3 P7.4 P7.7 P7.8 P8.1 P8.2 P8.3 P8.4 P8.5 P8.6 P8.7 P8.8 P9.1 P9.2 P12.1 P12.2 U5.5 U5.6 U5.7 U7.1 U7.2 U7.3 U7.4 U7.9 U7.10 U7.11 U7.12 U7.13 U7.14 U7.15 U8.5 U8.6 U8.7

## Polygon pours and split planes (outlines as drawn)
GND on Bottom Layer "Top Layer-No Net" (solid, pour order 6): 55,1875 55,175 45,165 55,175 2765,175 2765,1875 55,1875
GND on Top Layer "Top Layer-No Net" (solid, pour order 8): 45,1865 45,165 55,175 2760,175 2760,1860 2755,1865 2745,1875 55,1875

## Other copper
Multi-Layer:
  the board outline again, w10

## Text inside footprints (layer, text, board x,y; h text height)
P2: Top Overlay "2" at 2870,290 h50 r90; Top Overlay "1" at 2970,290 h50 r90; Top Overlay "15" at 2970,1150 h50 r90; Top Overlay "16" at 2870,1150 h50 r90
P12: Top Overlay "2" at 2870,1090 h50 r90; Top Overlay "1" at 2970,1090 h50 r90; Top Overlay "15" at 2970,1950 h50 r90; Top Overlay "16" at 2870,1950 h50 r90